# Altium PCB RasPiHAT-DISPLAY.PcbDoc
Units mil, origin at the board's own origin, x right, y up, seen from the top; angles counter-clockwise.
Board outline 2560 x 2205 mil, 2 copper layers (Top, Bottom), stack 61.811 mil thick; 44 components, 31 nets, 192 pads, 23 vias.
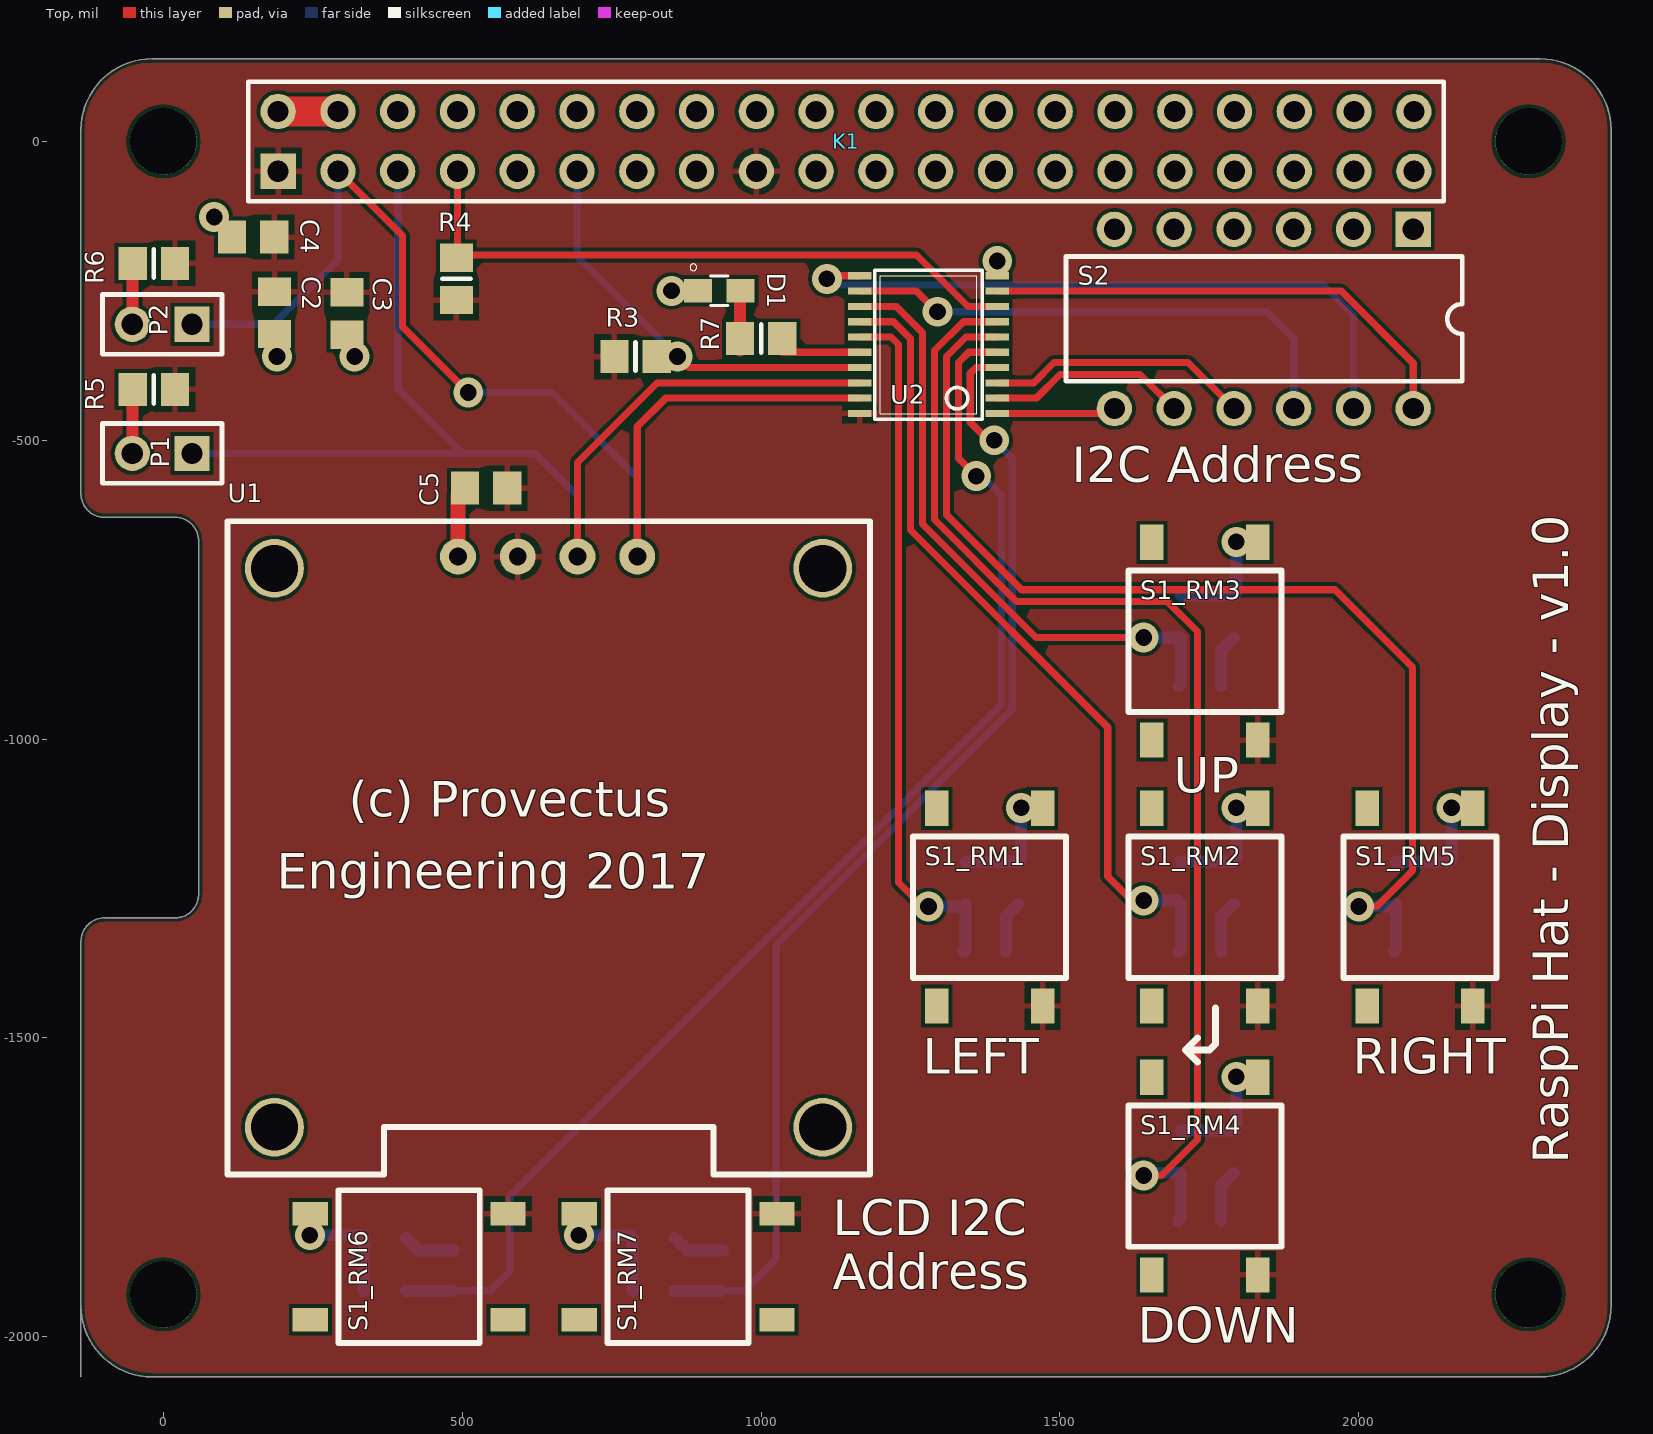
[diagram p0: Top view]
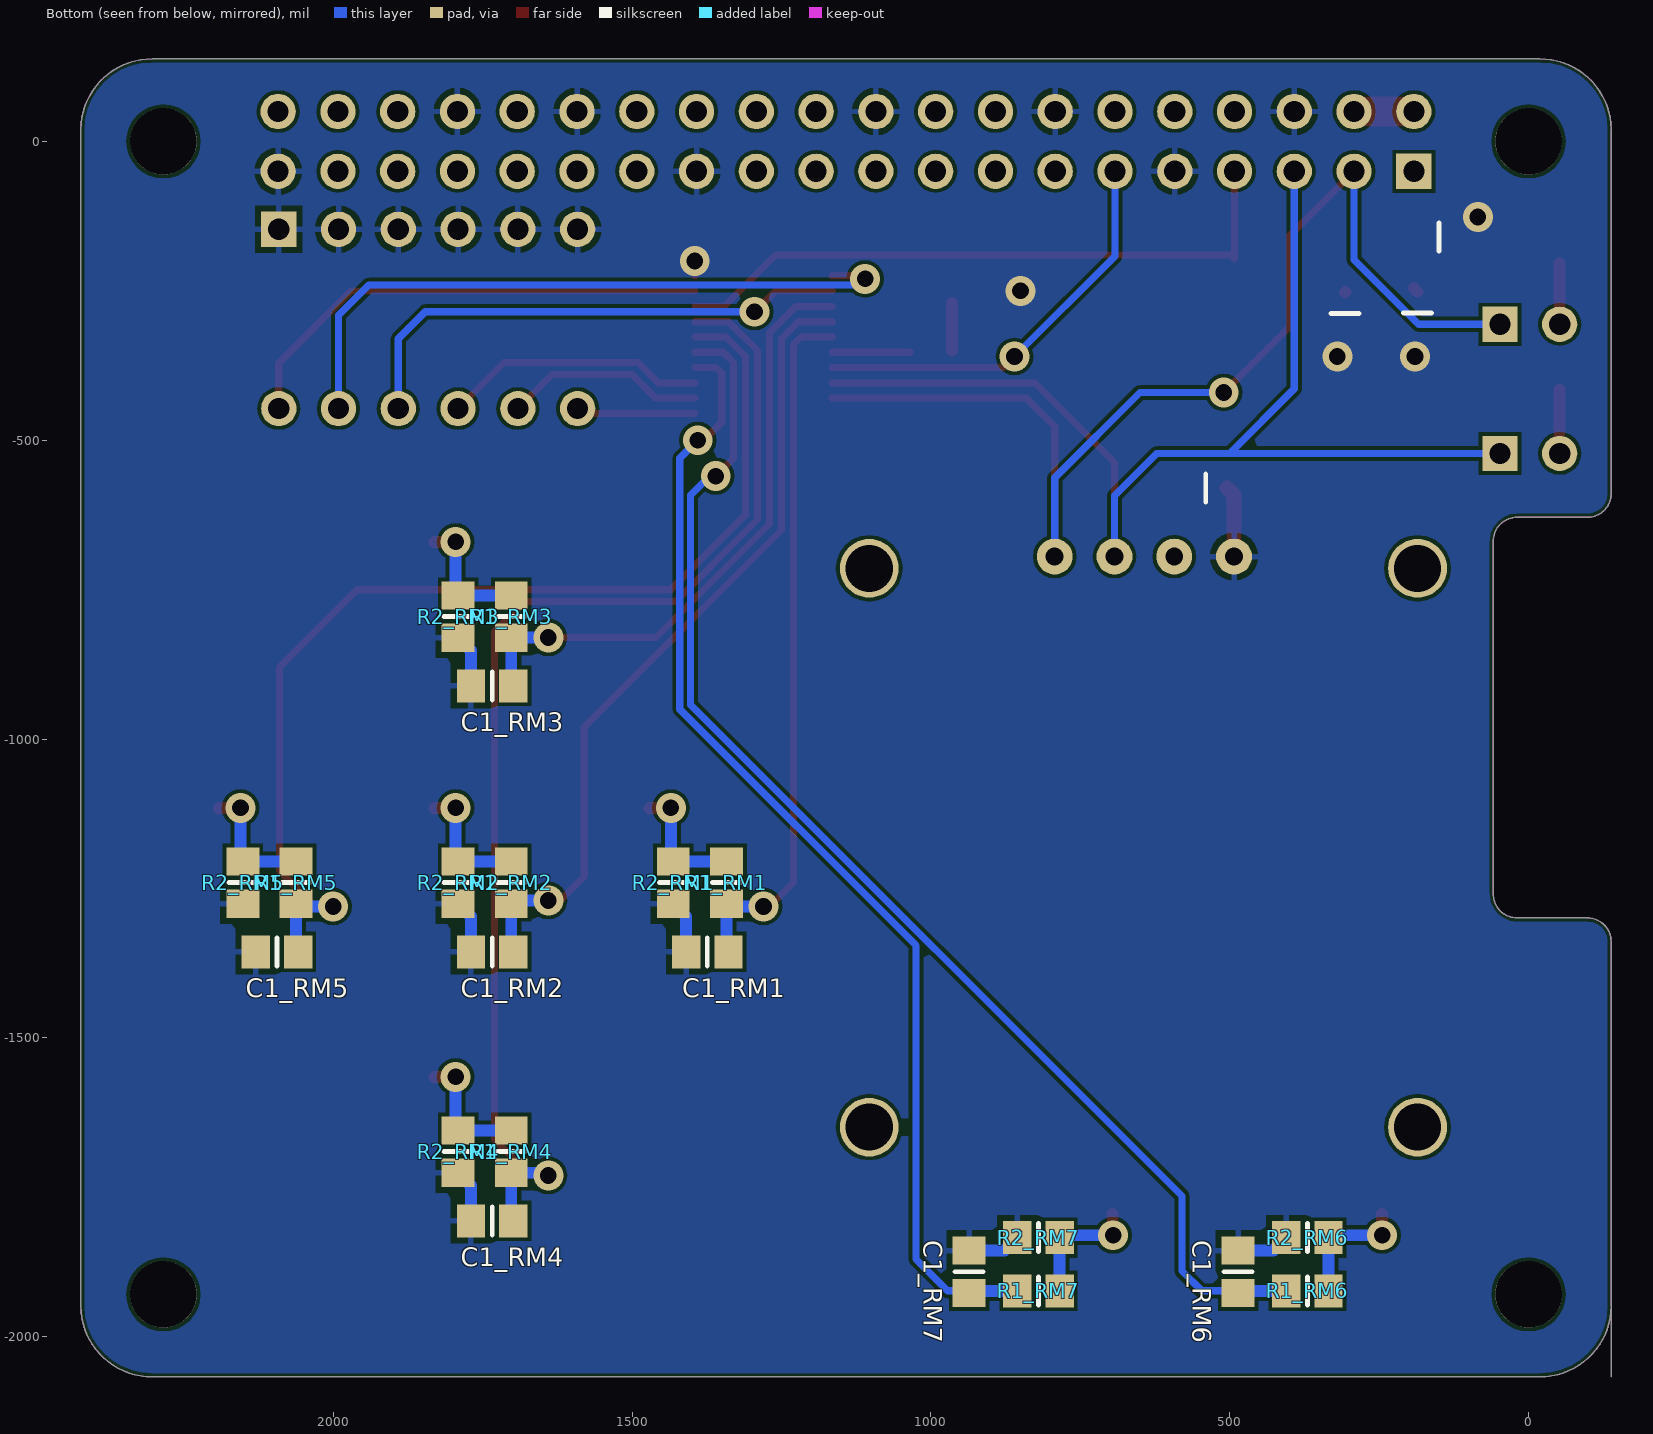
[diagram p1: Bottom view, seen from below]

## Layer stack, top to bottom
Top Solder: solder mask 0.4, Solder Resist, Dk 3.5
Top: signal copper 1.378
Dielectric 1: core 59.0551, FR-4, Dk 4.8
Bottom: signal copper 1.378
Bottom Solder: solder mask 0.4, Solder Resist, Dk 3.5

## Board outline
-138,-1948 ccw(c-19,-1948) -19,-2067 2303,-2067 ccw(c2303,-1948) 2422,-1948 2422,20 ccw(c2303.5,19.5) 2303,138 -19,138 ccw(c-19.5,19.5) -138,20 -138,-590 ccw(c-98.5,-589.5) -98,-629 20,-629 cw(c19.5,-668.5) 59,-669 59,-1259 cw(c19.5,-1259.5) 20,-1299 -98,-1299 ccw(c-98.5,-1338.5) -138,-1338 -138,-2067

## Design rules (kind name [scope] priority, off if disabled: settings)
Clearance mdViaVia [IsVia vs IsVia] p1: gap=6
Clearance mdPadVia [IsPad vs IsVia] p2: gap=6
Clearance mdPadPad [IsPad vs IsPad] p3: gap=6
Clearance mdWireVia [(InLayerClass('Signal Layers') AND IsTrack) vs IsVia] p4: gap=6
Clearance mdWirePad [(InLayerClass('Signal Layers') AND IsTrack) vs IsPad] p5: gap=6
Clearance mdWireWire [(InLayerClass('Signal Layers') AND IsTrack) vs (InLayerClass('Signal Layers') AND IsTrack)] p6: gap=6
Clearance [All] p7: gap=6
HoleSize [All] p1: absolutevalues=TRUE maxlimit=100000 minlimit=12 maxpercent=80.000 minpercent=20.000
HoleToHoleClearance [All] p1: gap=8 allowstackedmicrovias=TRUE
PolygonConnect ThermalVias [IsVia] p1: connectstyle=Direct reliefconductorwidth=10 reliefentries=4 polygonreliefangle="90 Angle" airgapwidth=10
PolygonConnect [All] p2: connectstyle=Relief reliefconductorwidth=10 reliefentries=4 polygonreliefangle="90 Angle" airgapwidth=10
RoomDefinition RM4 [InComponentClass('RM4')] p1: confinementstyle=ConfineIn formatcopy=TRUE lockcomponents=FALSE outline 1915,-1945 1915,-1520 1570,-1520 1570,-1945
RoomDefinition RM7 [InComponentClass('RM7')] p2: confinementstyle=ConfineIn formatcopy=TRUE lockcomponents=FALSE outline 1075,-1710 650,-1710 650,-2055 1075,-2055
RoomDefinition RM6 [InComponentClass('RM6')] p3: confinementstyle=ConfineIn formatcopy=TRUE lockcomponents=FALSE outline 625,-1710 200,-1710 200,-2055 625,-2055
RoomDefinition RM5 [InComponentClass('RM5')] p4: confinementstyle=ConfineIn formatcopy=TRUE lockcomponents=FALSE outline 2275,-1495 2275,-1070 1930,-1070 1930,-1495
RoomDefinition RasPiHAT-DISPLAY [InComponentClass('RasPiHAT-DISPLAY')] p5: confinementstyle=ConfineIn formatcopy=TRUE lockcomponents=FALSE outline -160,-2080 2450,-2080 2450,160 -160,160
RoomDefinition RM1 [InComponentClass('RM1')] p6: confinementstyle=ConfineIn formatcopy=TRUE lockcomponents=FALSE outline 1555,-1495 1555,-1070 1210,-1070 1210,-1495
RoomDefinition RM2 [InComponentClass('RM2')] p7: confinementstyle=ConfineIn formatcopy=TRUE lockcomponents=FALSE outline 1915,-1495 1915,-1070 1570,-1070 1570,-1495
RoomDefinition RM3 [InComponentClass('RM3')] p8: confinementstyle=ConfineIn formatcopy=TRUE lockcomponents=FALSE outline 1915,-1050 1915,-625 1570,-625 1570,-1050
RoutingVias [All] p1: holewidth=28 width=50 viastyle="Through Hole" minholewidth=28 minwidth=50 maxholewidth=28 maxwidth=50
SilkToSilkClearance [All] p1 off: silktosilkclearance=10
SilkToSolderMaskClearance [IsPad] p1 off: minsilkscreentomaskgap=10 clearancetoexposedcopper=TRUE
SolderMaskExpansion [All] p1: expansion=2
Width [All] p1: maxlimit=100000 minlimit=6 preferedwidth=10
26 further rules are at their usual default settings.

## Classes and differential pairs
channel class PushButton: RM1 RM2 RM3 RM4 RM5 RM6 RM7
component class RM7: C1_RM7 R1_RM7 R2_RM7 S1_RM7
component class RM6: C1_RM6 R1_RM6 R2_RM6 S1_RM6
component class RM5: C1_RM5 R1_RM5 R2_RM5 S1_RM5
component class RM1: C1_RM1 R1_RM1 R2_RM1 S1_RM1
component class RM2: C1_RM2 R1_RM2 R2_RM2 S1_RM2
component class RM3: C1_RM3 R1_RM3 R2_RM3 S1_RM3
component class RM4: C1_RM4 R1_RM4 R2_RM4 S1_RM4
component class RasPiHAT-DISPLAY: C2 C3 C4 C5 D1 J1 K1 P1 P2 R3 R4 R5 R6 R7 S2 U1 U2

## Components (designator, comment, footprint, x,y, rotation, side; value= is the part's Value field where it differs from the comment)
C1_RM1 "0805" 6-0805_N#1 1374,-1356 r0 bottom (schematic designator C1)
C1_RM2 "0805" 6-0805_N#1 1734,-1356 r0 bottom (schematic designator C1)
C1_RM3 "0805" 6-0805_N#1 1734,-911 r0 bottom (schematic designator C1)
C1_RM4 "0805" 6-0805_N#1 1734,-1806 r0 bottom (schematic designator C1)
C1_RM5 "0805" 6-0805_N#1 2094,-1356 r0 bottom (schematic designator C1)
C1_RM6 "0805" 6-0805_N#1 486,-1891 r90 bottom (schematic designator C1)
C1_RM7 "0805" 6-0805_N#1 936,-1891 r90 bottom (schematic designator C1)
C2 "Cap" 6-0805_N#2 186,-287 r270 top
C3 "Cap" 6-0805_N#2 307,-288 r270 top
C4 "Cap" 6-0805_N#2 150,-160 r180 top
C5 "0805" 6-0805_N#2 540,-580 r0 top
D1 "0805_LED" LEDSC200X125X70-2N_598-8160-107F(Primary) 930,-250 r0 top
K1 "PIN20X2" HDR2X20 192,-50 r0 top
P1 "Header 2" HDR1X2 48,-522 r180 top
P2 "Header 2" HDR1X2 48,-306 r180 top
R1_RM1 "0805" 6-0805_N#1 1342,-1240 r90 bottom (schematic designator R1)
R1_RM2 "0805" 6-0805_N#1 1702,-1240 r90 bottom (schematic designator R1)
R1_RM3 "0805" 6-0805_N#1 1702,-795 r90 bottom (schematic designator R1)
R1_RM4 "0805" 6-0805_N#1 1702,-1690 r90 bottom (schematic designator R1)
R1_RM5 "0805" 6-0805_N#1 2062,-1240 r90 bottom (schematic designator R1)
R1_RM6 "0805" 6-0805_N#1 370,-1923 r180 bottom (schematic designator R1)
R1_RM7 "0805" 6-0805_N#1 820,-1923 r180 bottom (schematic designator R1)
R2_RM1 "0805" 6-0805_N#1 1431,-1240 r90 bottom (schematic designator R2)
R2_RM2 "0805" 6-0805_N#1 1791,-1240 r90 bottom (schematic designator R2)
R2_RM3 "0805" 6-0805_N#1 1791,-795 r90 bottom (schematic designator R2)
R2_RM4 "0805" 6-0805_N#1 1791,-1690 r90 bottom (schematic designator R2)
R2_RM5 "0805" 6-0805_N#1 2151,-1240 r90 bottom (schematic designator R2)
R2_RM6 "0805" 6-0805_N#1 370,-1834 r180 bottom (schematic designator R2)
R2_RM7 "0805" 6-0805_N#1 820,-1834 r180 bottom (schematic designator R2)
R3 "Res1" 6-0805_N#1 790,-360 r0 top
R4 "Res1" 6-0805_N#1 490,-230 r90 top
R5 "Res1" 6-0805_N#1 -16,-415 r180 top
R6 "Res1" 6-0805_N#1 -16,-204 r180 top
R7 "Res1" 6-0805_N#1 1000,-330 r180 top
S1_RM1 "SMD Pushbutton" SMD_PB 1490.57,-1478 r90 top (schematic designator S1)
S1_RM2 "SMD Pushbutton" SMD_PB 1850.57,-1478 r90 top (schematic designator S1)
S1_RM3 "SMD Pushbutton" SMD_PB 1850.57,-1033 r90 top (schematic designator S1)
S1_RM4 "SMD Pushbutton" SMD_PB 1850.57,-1928 r90 top (schematic designator S1)
S1_RM5 "SMD Pushbutton" SMD_PB 2210.57,-1478 r90 top (schematic designator S1)
S1_RM6 "SMD Pushbutton" SMD_PB 608,-1774.43 r180 top (schematic designator S1)
S1_RM7 "SMD Pushbutton" SMD_PB 1058,-1774.43 r180 top (schematic designator S1)
S2 "SW DIP-6" DIP-12/SW 1841,-297 r180 top
U1 "0.96\" OLED LCD" "0.96 OLED LCD" 107,-1728 r0 top
U2 "PCA9501" TSSOP20 1280,-340 r90 top

## Footprints (in the part's own frame and the unit in brackets; to place one, negate y for a bottom-side part, rotate by r counter-clockwise, add the part's x,y. Pads: shape width x height; smd on the part's side, far side on the other; paste and mask are expansions set on the pad)
"0.96 OLED LCD" [mm]
  round 1.524 hole 0.762: 1(9.8,26.25) 2(12.34,26.25) 3(14.88,26.25) 4(17.42,26.25)
  round 2.5 hole 2: ""(2,2) ""(2,25.75) ""(25.3,2) ""(25.3,25.75)
  silkscreen extent 0,0 27.3,27.75
6-0805_N#1 [mm] "Chip Resistor, Body 2.0x1.2mm, IPC Medium Density"
  rect 1.2x1.4 smd: 1(-0.9,0) 2(0.9,0)
  silkscreen extent 0,-0.6 0,0.6, body extent -1.07,-0.7 1.07,0.7, height 0.7
6-0805_N#2 [mm] "Chip Resistor, Body 2.0x1.2mm, IPC Medium Density"
  rect 1.2x1.4 smd: 1(0.9,0) 2(-0.9,0)
  body extent -1.07,-0.7 1.07,0.7, height 0.7
DIP-12/SW [mm] "DIP Switch; 12 Leads"
  rect 1.5x1.5 hole 0.9: 1(-6.35,-3.81)
  round 1.5 hole 0.9: 2(-3.81,-3.81) 3(-1.27,-3.81) 4(1.27,-3.81) 5(3.81,-3.81) 6(6.35,-3.81) 7(6.35,3.81) 8(3.81,3.81) 9(1.27,3.81) 10(-1.27,3.81) 11(-3.81,3.81) 12(-6.35,3.81)
  silkscreen extent -8.43,-2.65 8.41,2.65
HDR1X2 [mm] "Connector; Header; 2 Position"
  rect 1.5x1.5 hole 0.9: 1(0,0)
  round 1.5 hole 0.9: 2(2.54,0)
  silkscreen extent -1.27,-1.27 3.81,1.27
HDR2X20 [mm] "Connector; Header; 20x2 Position"
  rect 1.5x1.5 hole 0.9: 1(0,0)
  round 1.5 hole 0.9: 2(0,2.54) 3(2.54,0) 4(2.54,2.54) 5(5.08,0) 6(5.08,2.54) 7(7.62,0) 8(7.62,2.54) 9(10.16,0) 10(10.16,2.54) 11(12.7,0) 12(12.7,2.54) 13(15.24,0) 14(15.24,2.54) 15(17.78,0) 16(17.78,2.54) 17(20.32,0) 18(20.32,2.54) 19(22.86,0) 20(22.86,2.54) 21(25.4,0) 22(25.4,2.54) 23(27.94,0) 24(27.94,2.54) 25(30.48,0) 26(30.48,2.54) 27(33.02,0) 28(33.02,2.54) 29(35.56,0) 30(35.56,2.54) 31(38.1,0) 32(38.1,2.54) 33(40.64,0) 34(40.64,2.54) 35(43.18,0) 36(43.18,2.54) 37(45.72,0) 38(45.72,2.54) 39(48.26,0) 40(48.26,2.54)
  silkscreen extent -1.27,-1.27 49.53,3.81
LEDSC200X125X70-2N_598-8160-107F(Primary) [mm]
  rect 1.2x1 smd paste-25.4 mask-25.4: A(0.9,0) C(-0.9,0)
  silkscreen extent -1.24,-0.63 0.38,1.14
SMD_PB [mm] "Surface Mount Push Button (4 PIN)"
  rect 1.5x1 smd: 1(0.8,5) 2(0.8,0.5) 3(9.2,0.5) 4(9.2,5)
  round 0 all layers, no hole: 3(9.2,0.5) 4(9.2,5)
  silkscreen extent 2,-0.5 8,6
TSSOP20 [mil]
  rect 12x39 smd paste-1000 mask-1000: 1(-115.16,-114.87) 2(-89.57,-114.87) 3(-63.98,-114.87) 4(-38.39,-114.87) 5(-12.8,-114.87) 6(12.8,-114.87) 7(38.39,-114.87) 8(63.98,-114.87) 9(89.57,-114.87) 10(115.16,-114.87) 11(115.16,114.87) 12(89.57,114.87) 13(63.98,114.87) 14(38.39,114.87) 15(12.8,114.87) 16(-12.8,114.87) 17(-38.39,114.87) 18(-63.98,114.87) 19(-89.57,114.87) 20(-115.16,114.87)
  silkscreen extent -125,-90 125,90

## Part data
C1_RM1 C1_RM2 C1_RM3 C1_RM4 C1_RM5 C1_RM6 C1_RM7 C5: library part "Cap Semi", "Capacitor"
C2 C3 C4: "Capacitor"
D1: library part 598-8160-107F, "LED, SMD; 0805; Yellow-Green; Water Clear Lens; 40mcd; 570/575nm"
P1 P2: "Header, 2-Pin"
R1_RM1 R1_RM2 R1_RM3 R1_RM4 R1_RM5 R1_RM6 R1_RM7 R2_RM1 R2_RM2 R2_RM3 R2_RM4 R2_RM5 R2_RM6 R2_RM7: library part Res3, "Resistor, 0.25W"
R3 R4 R5 R6 R7: "Resistor"
S1_RM1 S1_RM2 S1_RM3 S1_RM4 S1_RM5 S1_RM6 S1_RM7: library part SMD_PB
S2: "DIP Switch, 6 Position, SPST"

## Free pads (board coordinates)
  round 111 hole 111: 1(0,-1929) 1(0,0) 1(2284,-1929) 1(2284,0)

## Via types
v1: diameter 50, hole 28, Top to Bottom, 23 vias

## Nets (pads, with @x,y where several pads share a name; then routed paths per layer and width w, separated by ;. In a path a pad name is that pad's centre, name@x,y a point inside that pad or via, vN(x,y) a via of type N, cw(c..) or ccw(c..) an arc to the next point about the centre after c; other vN are vias at no path point)
+3V3: C2.2 C3.2 C4.2 C5.1 K1.1 K1.17 R3.1 R4.1 R5.1 R6.1 S1_RM1.2 S1_RM2.2 S1_RM3.2 S1_RM4.2 S1_RM5.2 S1_RM6.2 S1_RM7.2 U1.2 U2.20 | length 9.9
  Top w20: C2.2 C2.2@192,-245.57 ; C3.2@306,-251.57 C3.2
+5V: K1.2 K1.4 | length 100
  Top w50: K1.2 K1.4
EEPROM_WC: K1.11 R3.2 U2.17 | length 692.3
  Top w12: v1(860,-360) 878.39,-378.39 U2.17
  Bottom w12: K1.11 692,-192 v1(860,-360)
GND: C1_RM1.2 C1_RM2.2 C1_RM3.2 C1_RM4.2 C1_RM5.2 C1_RM6.2 C1_RM7.2 C2.1 C3.1 C4.1 C5.2 D1.C K1.6 K1.9 K1.14 K1.20 K1.25 K1.30 K1.34 K1.39 R2_RM1.1 R2_RM2.1 R2_RM3.1 R2_RM4.1 R2_RM5.1 R2_RM6.1 R2_RM7.1 S2.1 S2.2 S2.3 S2.4 S2.5 S2.6 U1.1 U2.10 | length 691.3
  Top w12: U2.10 v1@1394.87,-190.13
  Top w20: v1@1394.87,-190.13 v1@1395,-190.25
  Top w25: U1.1 492.83,-591.74 C5.2
  Bottom w20: R2_RM6.1 427,-1855.57 C1_RM6.2 ; R2_RM7.1 877,-1855.57 C1_RM7.2 ; C1_RM1.2 1409.43,-1297 R2_RM1.1 ; C1_RM4.2 1769.43,-1747 R2_RM4.1 ; C1_RM2.2 1769.43,-1297 R2_RM2.1 ; C1_RM3.2 1769.43,-852 R2_RM3.1
  other v1: 190,-360 320,-360 850,-250 1395,-200 84.94,-126.44
INTERRUPT: K1.7 R4.2 U2.8 | length 1087.8
  Top w12: K1.7 492,-196.57 498.57,-190 1260,-190 1346.02,-276.02 U2.8
NetC1_RM1_1: C1_RM1.1 R1_RM1.1 U2.15 | length 1176.2
  Top w12: U2.15 1217.2,-327.2 1230,-340 1230,-1240 1270,-1280 v1(1280,-1280)
  Bottom w20: v1(1280,-1280) R1_RM1.1@1337.43,-1280 ; C1_RM1.1 1342,-1352.57 R1_RM1.1
NetC1_RM2_1: C1_RM2.1 R1_RM2.1 U2.14 | length 1356.1
  Top w12: U2.14 1221.61,-301.61 1250,-330 1250,-650 1580,-980 1580,-1230 1620,-1270 v1(1640,-1270)
  Bottom w12: R1_RM2.1@1696.57,-1270 R1_RM2.1
  Bottom w20: v1(1640,-1270) R1_RM2.1@1696.57,-1270 ; C1_RM2.1 1702,-1352.57 R1_RM2.1
NetC1_RM3_1: C1_RM3.1 R1_RM3.1 U2.13 | length 1035.3
  Top w12: U2.13 1226.02,-276.02 1270,-320 1270,-640 1460,-830 v1(1640,-830)
  Bottom w20: v1(1640,-830) R1_RM3.1@1701.57,-830 ; C1_RM3.1 1702,-907.57 R1_RM3.1
NetC1_RM4_1: C1_RM4.1 R1_RM4.1 U2.7 | length 2035.9
  Top w12: U2.7 1338.39,-301.61 1290,-350 1290,-632.7 1427.3,-770 1680,-770 1730,-820 1730,-1670 1670,-1730 v1(1640,-1730)
  Bottom w20: v1(1640,-1730) 1644.57,-1725.43 R1_RM4.1 1702,-1802.57 C1_RM4.1
NetC1_RM5_1: C1_RM5.1 R1_RM5.1 U2.6 | length 1839.5
  Top w12: U2.6 1342.8,-327.2 1310,-360 1310,-624.54 1435.46,-750 1960,-750 2090,-880 2090,-1220 2030,-1280 v1@2010,-1280
  Bottom w20: v1(2000,-1280) 2057.43,-1280 R1_RM5.1 2062,-1352.57 C1_RM5.1
NetC1_RM6_1: C1_RM6.1 R1_RM6.1 U2.5 | length 2156.4
  Top w12: v1(1360,-560) 1330,-530 1330,-370 1347.2,-352.8 U2.5
  Bottom w12: C1_RM6.1@482.57,-1923 547,-1923 580,-1890 580,-1764.54 1402,-942.54 1402,-592 1370,-560 v1(1360,-560)
  Bottom w20: R1_RM6.1 C1_RM6.1@482.57,-1923
NetC1_RM7_1: C1_RM7.1 R1_RM7.1 U2.4 | length 1920.8
  Top w12: v1(1390,-500) 1380,-500 1350,-470 1350,-388 1359.61,-378.39 U2.4
  Bottom w12: C1_RM7.1@932.57,-1923 972,-1923 1025,-1870 1025,-1345 1420,-950 1420,-530 v1(1390,-500)
  Bottom w20: R1_RM7.1 C1_RM7.1@932.57,-1923
NetD1_A: D1.A R7.2 | length 80
  Top w20: R7.2@964.57,-350 964.57,-270
NetP1_2: P1.2 R5.2 | length 107.2
  Top w20: P1.2 -51.43,-521.43 R5.2
NetP2_2: P2.2 R6.2 | length 102.2
  Top w20: P2.2 -51.43,-305.43 R6.2
NetR1_RM1_2: R1_RM1.2 R2_RM1.2 S1_RM1.3 | length 216.4
  Top w20: v1(1435,-1115) 1470.09,-1115 S1_RM1.3@1470.88,-1115.8
  Bottom w20: R1_RM1.2 R2_RM1.2 1435,-1200.57 v1(1435,-1115)
NetR1_RM2_2: R1_RM2.2 R2_RM2.2 S1_RM2.3 | length 216.4
  Top w20: v1(1795,-1115) 1830.09,-1115 S1_RM2.3@1830.88,-1115.8
  Bottom w20: R1_RM2.2 R2_RM2.2 1795,-1200.57 v1(1795,-1115)
NetR1_RM3_2: R1_RM3.2 R2_RM3.2 S1_RM3.3 | length 216.4
  Top w20: v1(1795,-670) 1830.09,-670 S1_RM3.3@1830.88,-670.8
  Bottom w20: R1_RM3.2 R2_RM3.2 1795,-755.57 v1(1795,-670)
NetR1_RM4_2: R1_RM4.2 R2_RM4.2 S1_RM4.3 | length 216.4
  Top w20: v1(1795,-1565) 1830.09,-1565 S1_RM4.3@1830.88,-1565.8
  Bottom w20: R1_RM4.2 R2_RM4.2 1795,-1650.57 v1(1795,-1565)
NetR1_RM5_2: R1_RM5.2 R2_RM5.2 S1_RM5.3 | length 216.4
  Top w20: v1(2155,-1115) 2190.09,-1115 S1_RM5.3@2190.88,-1115.8
  Bottom w20: R1_RM5.2 R2_RM5.2 2155,-1200.57 v1(2155,-1115)
NetR1_RM6_2: R1_RM6.2 R2_RM6.2 S1_RM6.3 | length 216.4
  Top w20: v1(245,-1830) 245,-1794.91 S1_RM6.3@245.8,-1794.12
  Bottom w20: v1(245,-1830) 330.57,-1830 R2_RM6.2 R1_RM6.2
NetR1_RM7_2: R1_RM7.2 R2_RM7.2 S1_RM7.3 | length 216.4
  Top w20: v1(695,-1830) 695.8,-1829.2 S1_RM7.3@695.8,-1794.12
  Bottom w20: v1(695,-1830) 780.57,-1830 R2_RM7.2 R1_RM7.2
NetR7_1: R7.1 U2.16 | length 129.7
  Top w12: R7.1@1035.43,-352.8 U2.16
NetS2_7: S2.7 U2.1 | length 199.5
  Top w12: U2.1 1582.84,-455.16 S2.7
NetS2_8: S2.8 U2.2 | length 336.1
  Top w12: U2.2 1460.43,-429.57 1500,-390 1634,-390 S2.8
NetS2_9: S2.9 U2.3 | length 442.1
  Top w12: U2.3 1456.02,-403.98 1490,-370 1714,-370 S2.9
NetS2_10: S2.10 U2.12 | length 875.8
  Top w12: U2.12 1259.57,-250.43 1294.13,-285 v1(1295,-285)
  Bottom w12: v1(1295,-285) 1846,-285 1891,-330 S2.10
NetS2_11: S2.11 U2.11 | length 1125.6
  Top w12: v1(1110,-230) 1110,-229.68 1114.84,-224.84 U2.11
  Bottom w12: v1(1110,-230) 1110,-240 1940,-240 1991,-291 S2.11
NetS2_12: S2.12 U2.9 | length 822.1
  Top w12: U2.9 1970.43,-250.43 2091,-371 S2.12
SCL: K1.5 P1.1 U1.3 U2.18 | length 1977.4
  Top w12: U1.3 692.83,-537.17 826.02,-403.98 U2.18
  Bottom w12: P1.1 500,-522 ; K1.5 392,-414 500,-522 ; U1.3 692.83,-592.83 622,-522 500,-522
SDA: K1.3 P2.1 U1.4 U2.19 | length 1992.1
  Top w12: K1.3 400,-158 400,-310 v1(510,-420) ; U1.4 792.83,-477.17 840.43,-429.57 U2.19
  Top w20: P2.1@48,-318 P2.1
  Bottom w12: P2.1 184,-306 292,-198 K1.3 ; v1(510,-420) 650,-420 792.83,-562.83 U1.4
pads on no net: K1.8 K1.10 K1.12 K1.13 K1.15 K1.16 K1.18 K1.19 K1.21 K1.22 K1.23 K1.24 K1.26 K1.27 K1.28 K1.29 K1.31 K1.32 K1.33 K1.35 K1.36 K1.37 K1.38 K1.40 S1_RM1.1 S1_RM1.4 S1_RM2.1 S1_RM2.4 S1_RM3.1 S1_RM3.4 S1_RM4.1 S1_RM4.4 S1_RM5.1 S1_RM5.4 S1_RM6.1 S1_RM6.4 S1_RM7.1 S1_RM7.4 U1.

## Polygon pours and split planes (outlines as drawn)
GND on Bottom "Bottom-No Net" (solid, remove dead copper, pour order 4): -150,150 2450,150 2450,-2100 -150,-2100
+3V3 on Top "Bottom-No Net" (solid, remove dead copper, pour order 8): -150,150 2450,150 2450,-2100 -150,-2100

## Keep-outs
Keep-Out Layer:
  lines w0: -138,-1948 ccw(c-19,-1948) -19,-2067 2303,-2067 ccw(c2303,-1948) 2422,-1948 2422,20 ccw(c2303.5,19.5) 2303,138 -19,138 ccw(c-19.5,19.5) -138,20 -138,-590 ccw(c-98.5,-589.5) -98,-629 20,-629 cw(c19.5,-668.5) 59,-669 59,-1259 cw(c19.5,-1259.5) 20,-1299 -98,-1299 ccw(c-98.5,-1338.5) -138,-1338 -138,-1948

## Silkscreen, mask and mechanical layers (free items; w line width, h text height)
Top Overlay:
  lines w12: 1730,-1540 1710,-1520 ; 1730,-1500 1710,-1520 ; 1760,-1450 1760,-1510 1750,-1520 1710,-1520
  text "I2C Address" at 1520,-570 h60
  text "UP" at 1690,-1090 h60
  text "(c) Provectus" at 310,-1130 h60
  text "Engineering 2017" at 190,-1250 h60
  text "LEFT" at 1270,-1560 h60
  text "RIGHT" at 1990,-1560 h60
  text "RaspPi Hat - Display - v1.0" at 2350,-1710 h60 r90
  text "LCD I2C" at 1120,-1830 h60
  text "Address" at 1120,-1920 h60
  text "DOWN" at 1630,-2010 h60
Dimension:
  lines w0: 59,-1259.51 59,-669 ccw(c19.5,-668.5) 20,-629 -98,-629 cw(c-98.5,-589.5) -138,-590 -138,20 cw(c-19.5,19.5) -19,138 2303,138 cw(c2303.5,19.5) 2422,20 2422,-1948 cw(c2303,-1948) 2303,-2067 -19,-2067 cw(c-19,-1948) -138,-1948 -138,-1338 cw(c-98.5,-1338.5) -98,-1299 20,-1299 ccw(c19.5,-1259.5) 59,-1259
tRestrict:
  circle w123: c2284,-1929 r62
  circle w123: c0,0 r62
  circle w123: c2284,0 r62
  circle w123: c0,-1929 r62
bRestrict:
  circle w123: c2284,-1929 r62
  circle w123: c0,-1929 r62
  circle w123: c0,0 r62
  circle w123: c2284,0 r62
Unrouted:
  lines w0: 192,-50 992,-50 2036,-675 2304,-412 2304,-312 ; 192,50 292,50 ; 1492,-50 2036,-525 2230,-312 ; 1492,50 2036,-575 2230,-412 ; 1845,-940 1851,-778 ; 1875,-815 2049,-924 ; 1881,-703 1949,-815 2073,-815